# Altium PCB PCB1.PcbDoc
Units mil, origin at the board's own origin, x right, y up, seen from the top; angles counter-clockwise.
Board outline 5000 x 2500 mil, 2 copper layers (Top Layer, Bottom Layer); 38 components, 55 nets, 182 pads, 20 vias.
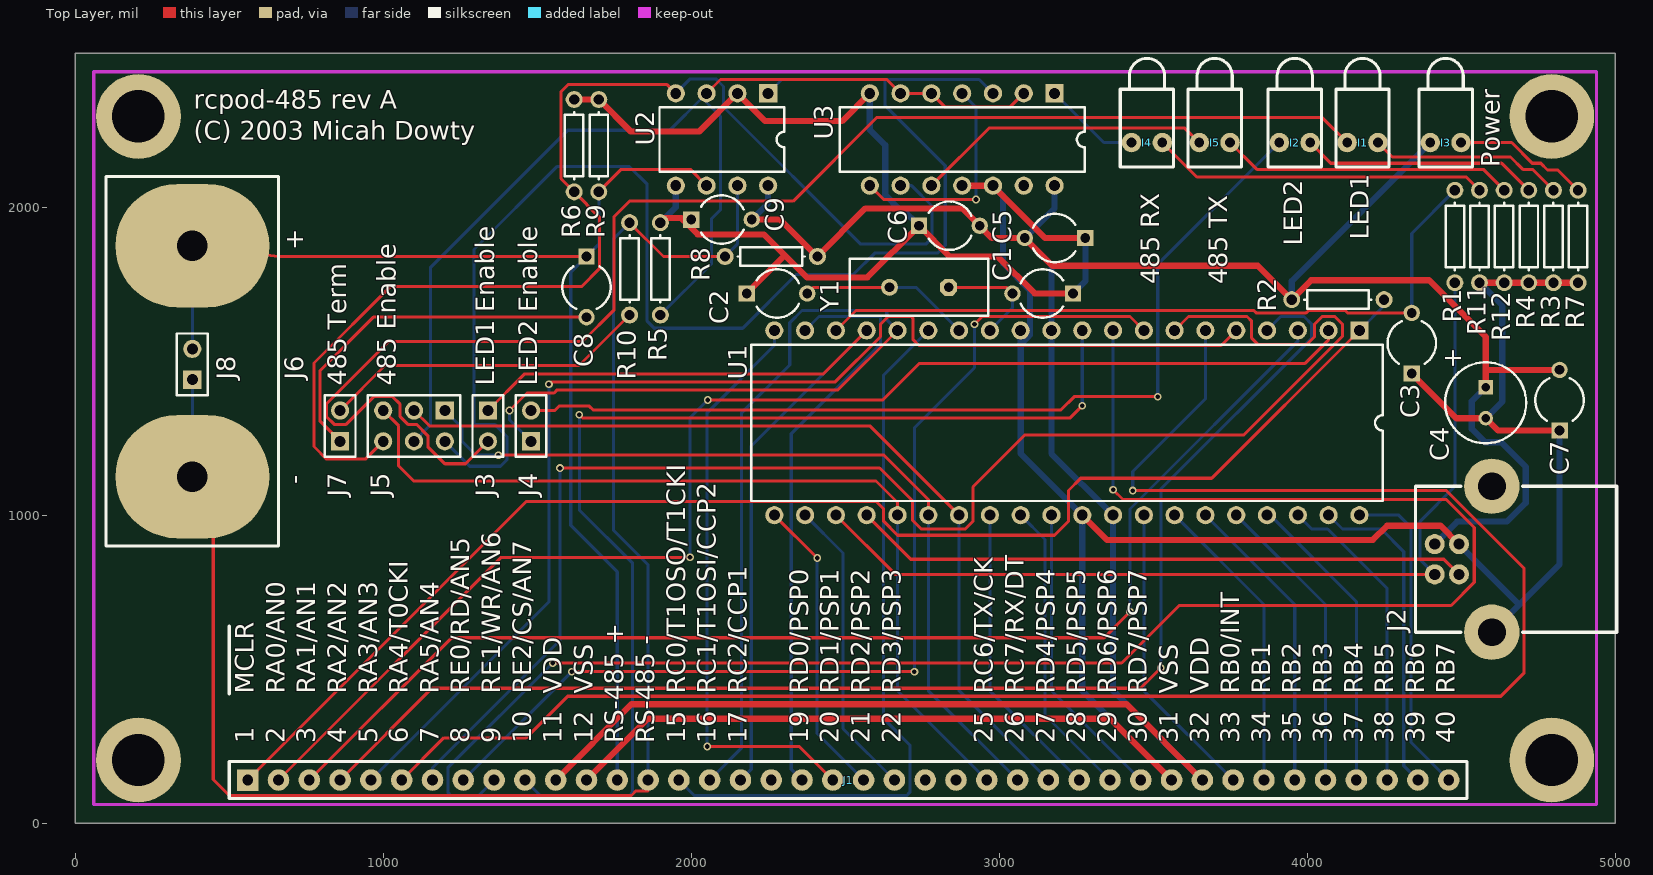
[diagram p0: Top Layer view]
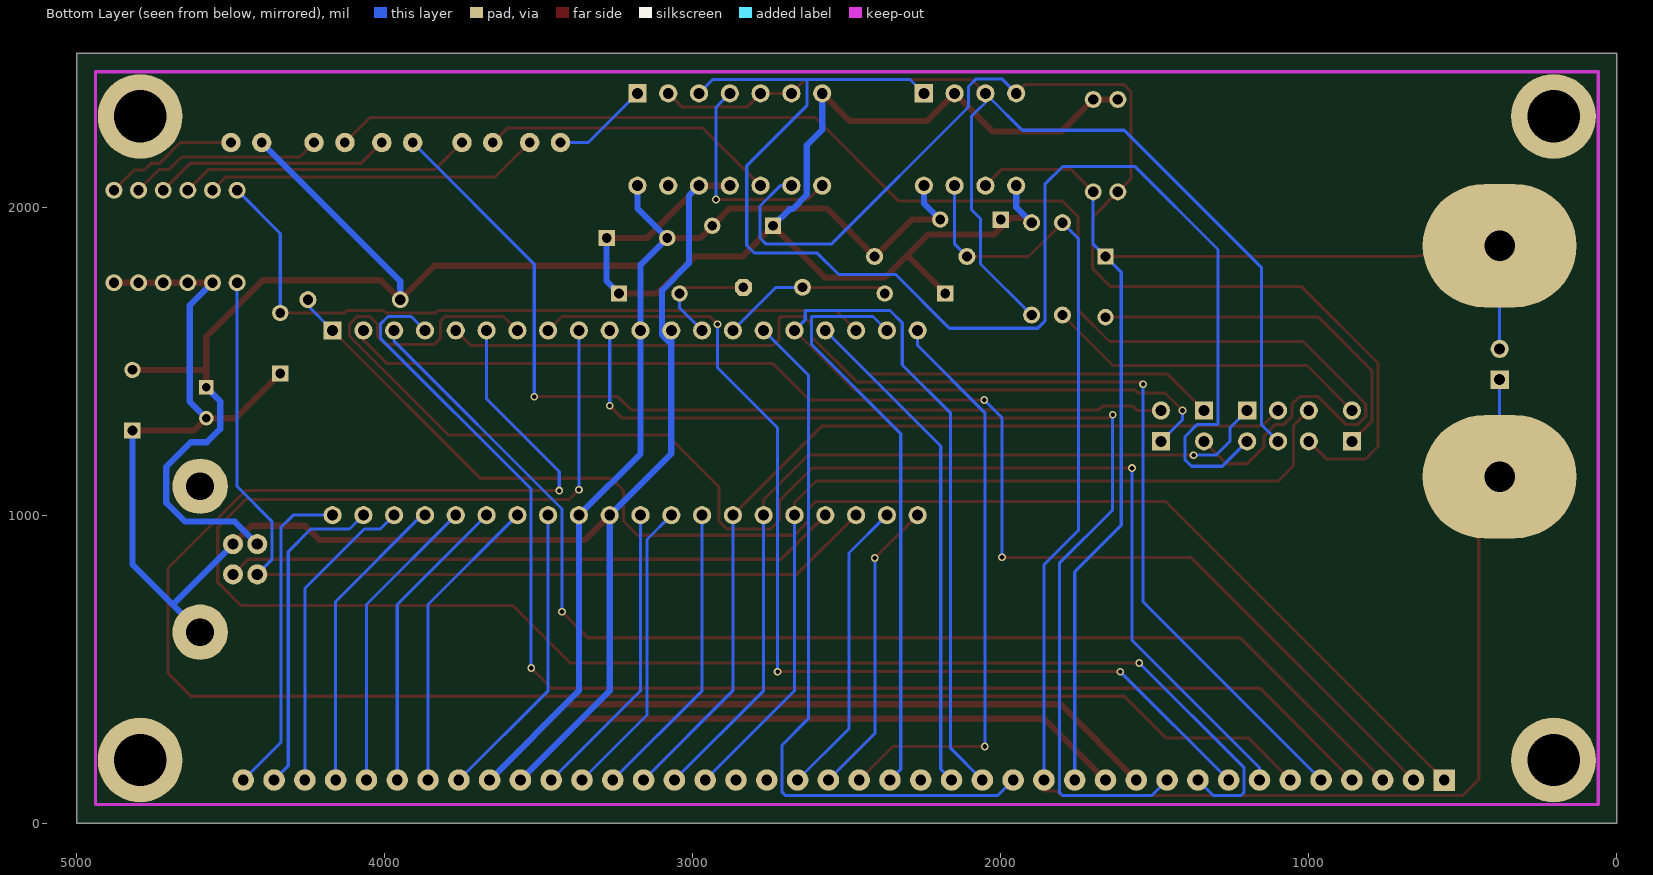
[diagram p1: Bottom Layer view, seen from below]

## Layer stack, top to bottom
Top Layer: signal copper 1.4
Dielectric: dielectric 12.6, FR-4, Dk 4.8
Bottom Layer: signal copper 1.4

## Board outline
0,0 5000,0 5000,2500 0,2500

## Design rules (kind name [scope] priority, off if disabled: settings)
Clearance [All] p1: gap=10
ComponentClearance [All] p1: gap=10 collisioncheckmode=0
PolygonConnect [All] p1: connectstyle=Relief reliefconductorwidth=10 reliefentries=4 polygonreliefangle="90 Angle"
RoomDefinition Sheet1 [InComponentClass('Sheet1')] p1: confinementstyle=ConfineIn formatcopy=TRUE outline 3940,6840 7320,6840 7320,7500 3940,7500
RoutingLayers [All] p1: top layer=Horizontal bottom layer=Vertical
RoutingVias [All] p1: holewidth=15 width=25 viastyle="Through Hole" minholewidth=15 minwidth=25 maxholewidth=15 maxwidth=25
SolderMaskExpansion [All] p1: expansion=4
TestPointUsage [All] p1: valid=0 allowmultiple=FALSE
Testpoint [All] p1: side=15 testpointundercomponent=TRUE minsize=40 maxsize=100 preferedsize=60 minholesize=0 maxholesize=40 preferedholesize=32 testpointgrid=1 style=1023 order=1234567890
Width Width_power [(InNet('VCC') or InNet('GND'))] p1: maxlimit=20 minlimit=10 preferedwidth=10 toplayer_minwidth=20 toplayer_prefwidth=20 bottomlayer_minwidth=20 bottomlayer_prefwidth=20 minimp=50.000000 maximp=50.000000 favimp=50.000000
Width [All] p2: maxlimit=10 minlimit=10 preferedwidth=10
16 further rules are at their usual default settings.

## Components (designator, comment, footprint, x,y, rotation, side; value= is the part's Value field where it differs from the comment)
C1 "Cap2" CAPR5-4X5 3240,1720 r180 top
C2 "Cap2" CAPR5-4X5 2180,1720 r0 top
C3 "" CAPR5-4X5 4340,1460 r90 top
C4 "10uF" CAP-EE-1 4580,1515 r90 top
C5 "" CAPR5-4X5 3280,1900 r180 top
C6 "" CAPR5-4X5 2740,1940 r0 top
C7 "" CAPR5-4X5 4820,1275 r90 top
C8 "" CAPR5-4X5 1660,1840 r270 top
C9 "" CAPR5-4X5 2000,1960 r0 top
I1 "LED1" LED-1-UNBROKE 4180,2210 r90 top
I2 "LED2" LED-1-UNBROKE 3960,2210 r90 top
I3 "Power" LED-1-UNBROKE 4450,2210 r90 top
I4 "485 RX" LED-1-UNBROKE 3480,2210 r90 top
I5 "485 TX" LED-1-UNBROKE 3700,2210 r90 top
J1 "GPIO" HR40 560,40 r90 top (schematic designator JP1)
J2 "USB" USB-TYPEB 4600,620 r90 top (schematic designator J1)
J3 "LED1 Enable" HDR1X2 1340,1340 r270 top
J4 "LED2 Enable" HDR1X2 1480,1240 r90 top
J5 "485 Enable" HDR2X3_NOTEXT 1200,1340 r180 top
J6 "RS-485" RS485J 380,1500 r90 top
J7 "485 Term" HDR1X2 860,1240 r90 top
J8 "RS-485" HDR1X2 380,1440 r90 top
R1 "Res1" AXIAL-0.3 4480,1905 r270 top
R2 "Res1" AXIAL-0.3 4100,1700 r180 top
R3 "Res1" AXIAL-0.3 4800,1905 r270 top
R4 "Res1" AXIAL-0.3 4720,1905 r270 top
R5 "Res1" AXIAL-0.3 1900,1800 r270 top
R6 "Res1" AXIAL-0.3 1620,2200 r270 top
R7 "" AXIAL-0.3 4880,1905 r270 top
R8 "" AXIAL-0.3 2260,1840 r180 top
R9 "" AXIAL-0.3 1700,2200 r90 top
R10 "" AXIAL-0.3 1800,1800 r90 top
R11 "" AXIAL-0.3 4560,1905 r270 top
R12 "" AXIAL-0.3 4640,1905 r270 top
U1 "PIC16C765" DIP-40 3220,1300 r180 top
U2 "MAX3082E" DIP-8 2100,2220 r180 top
U3 "MM74C02J" DIP-14 2880,2220 r180 top
Y1 "6 MHz" BCY-W2/E4.7 2740,1740 r180 top

## Footprints (in the part's own frame and the unit in brackets; to place one, negate y for a bottom-side part, rotate by r counter-clockwise, add the part's x,y. Pads: shape width x height; smd on the part's side, far side on the other; paste and mask are expansions set on the pad)
AXIAL-0.3 [mm]
  round 1.4 hole 0.85: 1(-3.81,0) 2(3.81,0)
  silkscreen extent -2.77,-0.76 2.77,0.76
BCY-W2/E4.7 [mm]
  oct 1.4x1.4 hole 0.8: 1(-2.44,0)
  round 1.4 hole 0.8: 2(2.44,0)
  silkscreen extent -5.7,-2.35 5.7,2.35
CAP-EE-1 [mm]
  rect 1.2x1.2 hole 0.7: 1(-2.54,0)
  round 1.2 hole 0.7: 2(-5.08,0)
  silkscreen extent -7.15,-3.34 -0.47,3.34
CAPR5-4X5 [mm]
  rect 1.35x1.35 hole 0.8: 1(0,0)
  round 1.35 hole 0.8: 2(5,0)
  silkscreen extent 0.81,-2 4.32,2
DIP-8 [mm]
  rect 1.5x1.5 hole 0.9: 1(-3.81,-3.81)
  round 1.5 hole 0.9: 2(-1.27,-3.81) 3(1.27,-3.81) 4(3.81,-3.81) 5(3.81,3.81) 6(1.27,3.81) 7(-1.27,3.81) 8(-3.81,3.81)
  silkscreen extent -5.15,-2.65 5.15,2.65
DIP-14 [mm]
  rect 1.5x1.5 hole 0.9: 1(-7.62,-3.81)
  round 1.5 hole 0.9: 2(-5.08,-3.81) 3(-2.54,-3.81) 4(0,-3.81) 5(2.54,-3.81) 6(5.08,-3.81) 7(7.62,-3.81) 8(7.62,3.81) 9(5.08,3.81) 10(2.54,3.81) 11(0,3.81) 12(-2.54,3.81) 13(-5.08,3.81) 14(-7.62,3.81)
  silkscreen extent -10.1,-2.65 10.1,2.65
DIP-40 [mm]
  rect 1.5x1.5 hole 0.9: 1(-24.13,-7.62)
  round 1.5 hole 0.9: 2(-21.59,-7.62) 3(-19.05,-7.62) 4(-16.51,-7.62) 5(-13.97,-7.62) 6(-11.43,-7.62) 7(-8.89,-7.62) 8(-6.35,-7.62) 9(-3.81,-7.62) 10(-1.27,-7.62) 11(1.27,-7.62) 12(3.81,-7.62) 13(6.35,-7.62) 14(8.89,-7.62) 15(11.43,-7.62) 16(13.97,-7.62) 17(16.51,-7.62) 18(19.05,-7.62) 19(21.59,-7.62) 20(24.13,-7.62) 21(24.13,7.62) 22(21.59,7.62) 23(19.05,7.62) 24(16.51,7.62) 25(13.97,7.62) 26(11.43,7.62) 27(8.89,7.62) 28(6.35,7.62) 29(3.81,7.62) 30(1.27,7.62) 31(-1.27,7.62) 32(-3.81,7.62) 33(-6.35,7.62) 34(-8.89,7.62) 35(-11.43,7.62) 36(-13.97,7.62) 37(-16.51,7.62) 38(-19.05,7.62) 39(-21.59,7.62) 40(-24.13,7.62)
  silkscreen extent -26.05,-6.45 26.05,6.45
HDR1X2 [mm]
  rect 1.5x1.5 hole 0.9: 1(0,0)
  round 1.5 hole 0.9: 2(2.54,0)
  silkscreen extent -1.27,-1.27 3.81,1.27
HDR2X3_NOTEXT [mm]
  rect 1.5x1.5 hole 0.9: 1(0,0)
  round 1.5 hole 0.9: 2(0,2.54) 3(2.54,0) 4(2.54,2.54) 5(5.08,0) 6(5.08,2.54)
  silkscreen extent -1.27,-1.27 6.35,3.81
HR40 [mil]
  rect 70x70 hole 35: 1(100,0)
  round 70 hole 35: 2(100,-100) 3(100,-200) 4(100,-300) 5(100,-400) 6(100,-500) 7(100,-600) 8(100,-700) 9(100,-800) 10(100,-900) 11(100,-1000) 12(100,-1100) 13(100,-1200) 14(100,-1300) 15(100,-1400) 16(100,-1500) 17(100,-1600) 18(100,-1700) 19(100,-1800) 20(100,-1900) 21(100,-2000) 22(100,-2100) 23(100,-2200) 24(100,-2300) 25(100,-2400) 26(100,-2500) 27(100,-2600) 28(100,-2700) 29(100,-2800) 30(100,-2900) 31(100,-3000) 32(100,-3100) 33(100,-3200) 34(100,-3300) 35(100,-3400) 36(100,-3500) 37(100,-3600) 38(100,-3700) 39(100,-3800) 40(100,-3900)
  silkscreen extent 40,-3960 600,60
LED-1-UNBROKE [mm]
  round 1.6 hole 0.8: 1(0,1.27) 2(0,-1.27)
  silkscreen extent -2,-2.2 6.95,2.2
RS485J [mil]
  oval 400x500 hole 100: 1(-375,0) 2(375,0)
  Top Layer lines w10: 180,0 375,0
  silkscreen extent -600,-280 600,280
USB-TYPEB [mm]
  round 1.651 hole 0.92: 1(7.27,4.71) 2(4.77,4.71) 3(4.77,2.71) 4(7.27,2.71)
  round 4.572 hole 2.3: 5(0,0) 5(12.04,0)
  silkscreen extent 0,-10.3 12.04,6.3

## Part data
C1 C2: "Capacitor"
C3 C5 C6 C7 C8 C9: library part Cap2, "Capacitor"
C4: library part "Cap Pol1", "Polarized Capacitor (Radial)"
I1: "Typical RED GaAs LED"
I2 I3 I4 I5: library part LED1, "Typical RED GaAs LED"
J1: library part MHDR2X20, "Header, 20-Pin, Dual row"
J2: library part "USB Type B", "Header, 4-Pin"
J3 J4 J6 J7 J8: library part MHDR1X2, "Header, 2-Pin"
J5: library part MHDR2X3, "Header, 3-Pin, Dual row"
R1 R2 R3 R4 R5 R6: "Resistor"
R7 R8 R9 R10 R11 R12: library part Res1, "Resistor"
U1: "EPROM-Based 8-Bit CMOS Microcontroller with USB"
U2: "+5V-Powered, RS-485 Driver/Receiver"
U3: library part MM74C00J, "Quad 2-Input NAND Gate"
Y1: library part XTAL, "Crystal Oscillator"

## Free pads (board coordinates)
  round 275 hole 170: 0(205,205) 0(205,2295) 0(4795,205) 0(4795,2295)

## Via types
v1: diameter 25, hole 15, Top Layer to Bottom Layer, 20 vias

## Nets (pads, with @x,y where several pads share a name; then routed paths per layer and width w, separated by ;. In a path a pad name is that pad's centre, name@x,y a point inside that pad or via, vN(x,y) a via of type N, cw(c..) or ccw(c..) an arc to the next point about the centre after c; other vN are vias at no path point)
GND: C1.1 C2.1 C3.1 C4.2 C5.1 C6.1 C7.1 C9.1 J1.12 J1.31 J2.4 J2.5@4600,620 R3.2 R4.2 R5.1 R6.1 R7.2 R9.2 R11.2 R12.2 U1.12 U1.31 U2.2 U2.5 U3.7 U3.11 U3.12 | length 12226.4
  Top Layer w20: R6.1 R9.2 1804,2246 2026,2246 U2.2 2240,2280 2490,2280 U3.7 ; J1.12 1859,339 3361,339 J1.31 ; R5.1 1915,1965 1968,1965 1973,1960 ; C9.1 1973,1960 ; C2.1 2304,1844 ; U3.11 U3.12 3150,1900 C5.1 ; C1.1 3115,1720 2995,1840 2840,1840 C6.1 2572,1772 2376,1772 2304,1844 ; U1.31 3350,920 4214,920 4260,966 4433.53,966 J2.4 ; C3.1 4485,1315 C4.2 4620,1275 C7.1 ; R11.2 R12.2 R4.2 R3.2 R7.2 ; 1973,1960 1986.5,1946.5 2021,1912 2236,1912 2304,1844
  Bottom Layer w20: R5.1 1950,2000 U2.5 ; U3.7 2580,2252 2630,2202 2630,2040 2676,1994 2686,1994 C6.1 ; U3.12 3013,2037 3013,1817.4 3100,1730.4 3100,1600 3100,1585.47 3092.26,1577.74 3070,1555.47 ; U1.12 3070,1555.47 ; C1.1 3280,1760 C5.1 ; J1.31 3270,430 U1.31 3070,1200 3070,1555.47 ; J2.4 4689.76,709.76 ; R11.2 4634,1681 4634,1369 C4.2 ; J2.5@4600,620 4689.76,709.76 ; C7.1 4820,840 4689.76,709.76
NetC1_2: C1.2 U1.13 Y1.1 | length 365.7
  Top Layer w10: Y1.1 3023.15,1740 C1.2
  Bottom Layer w10: U1.13 3043.15,1673.15 C1.2
NetC2_2: C2.2 U1.14 Y1.2 | length 559.4
  Top Layer w10: C2.2 2396.85,1740 Y1.2
  Bottom Layer w10: Y1.2 2730,1740 U1.14
NetC3_2: C3.2 R1.1 U1.18 | length 2363.1
  Top Layer w10: U1.18 2535,1665 3827,1665 3835,1657 3997,1657 4005,1665 4123.85,1665 4132,1656.85 C3.2
  Bottom Layer w10: C3.2 4340,1915 R1.1
NetC8_1: C8.1 J1.13 J6.2 J8.2 R9.1 U2.6 | length 4029.6
  Top Layer w10: J6.2 660,1840 680,1840 C8.1 ; R9.1 1773,2123 1997,2123 U2.6
  Bottom Layer w10: J8.2 J6.2 ; R9.1 1700,1880 C8.1 1609,1789 1609,967 1760,816 J1.13
NetC8_2: C8.2 J7.1 | length 1193.7
  Top Layer w10: J7.1 795,1305 795,1470.15 968,1643.15 C8.2
NetI1_1: I1.1 J3.2 | length 4689.7
  Top Layer w10: J3.2 1267,1167 1200,1167 1145,1222 1145,1257.97 1107.97,1295 1080,1295 1055,1320 1055,1360 1030,1385 969.53,1385 879.53,1295 840.47,1295 815,1320.47 815,1361 1018,1564 1647,1564 1750,1667 1750,1970 1800,2020 2331,2020 2602,2291 4049,2291 I1.1
NetI1_2: I1.2 R3.1 | length 634.2
  Top Layer w10: I1.2 4277,2163 4660.5,2163 4700.5,2123 4732,2123 R3.1
NetI2_1: I2.1 J4.2 | length 3052.2
  Top Layer w10: J4.2 1557,1340 1571,1354 1669,1354 1681,1342 3201,1342 3244,1385 v1(3515,1385)
  Bottom Layer w10: v1(3515,1385) 3515,1815 I2.1
NetI2_2: I2.2 R4.1 | length 774.2
  Top Layer w10: I2.2 4077,2143 4632,2143 R4.1
NetI3_2: I3.2 R7.1 | length 444.2
  Top Layer w10: I3.2 4664.33,2210 4731.33,2143 4759,2143 4781,2121 4814,2121 R7.1
NetI4_1: I4.1 U3.1 | length 316.3
  Bottom Layer w10: U3.1 3340,2210 I4.1
NetI4_2: I4.2 R11.1 | length 1094.2
  Top Layer w10: I4.2 3642,2098 4517,2098 R11.1
NetI5_1: I5.1 U3.10 | length 966.9
  Top Layer w10: U3.10 2967,2257 3603,2257 I5.1
NetI5_2: I5.2 R12.1 | length 954.2
  Top Layer w10: I5.2 3837,2123 4572,2123 R12.1
NetJ1_14: J1.14 J6.1 J8.1 R8.2 R10.2 U2.7 | length 5320.8
  Top Layer w10: J6.1 448,1125 448,142 500,90 1806,90 1821,105 1860,105 J1.14 ; R10.2 1910,1840 R8.2
  Bottom Layer w10: J6.1 J8.1 ; R10.2 1748,1898 1748,951 1860,839 J1.14 ; R8.2 2150,1880 U2.7
NetJ2_2: J2.2 R1.2 U1.23 | length 3037.9
  Top Layer w10: U1.23 2662.2,807.8 J2.2
  Bottom Layer w10: J2.2 4367,855.36 4367,980 4480,1093 R1.2
NetJ2_3: J2.3 U1.24 | length 2002.9
  Top Layer w10: U1.24 2713,857 4444.1,857 J2.3
NetJ5_2: J5.2 U2.1 U3.3 | length 4628.9
  Bottom Layer w10: J5.2 1281,1159 1381,1159 1402,1180 1402,1255 1362,1295 1295,1295 1295,1863 1564,2132 1800,2132 1857,2075 1857,1630 1880,1607 2167,1607 2342,1782 2527,1782 2596,1851 2800,1851 2825,1876 2825,2135 2630,2330 2630,2415 ; U2.1 2295,2415 2630,2415 ; U3.3 2935,2415 2630,2415
NetJ5_4: J5.4 R5.2 U2.3 U3.2 U3.5 U3.6 | length 3632.6
  Top Layer w10: U2.3 2095,2415 2635,2415 U3.6 U3.5 2825,2325 3035,2325 U3.2
  Bottom Layer w10: J5.4 1153,1293 1153,1804 1599,2250 1930,2250 U2.3@2035,2355 ; R5.2 2066,1816 2066,1963 2095,1992 2095,2295 U2.3@2035,2355 ; U2.3 U2.3@2035,2355
NetJ5_6: J5.6 R6.2 U2.4 U3.9 | length 3966.2
  Top Layer w10: J5.6 942,1182 816,1182 775,1223 775,1494 1023,1742 1644,1742 1702,1800 1702,1968 R6.2 1577,2093 1577,2375 1600,2398 1922,2398 U2.4
  Bottom Layer w10: U2.4 1997,2417 2080,2417 2105,2392 2105,2325.47 2550.47,1880 2762,1880 2782,1900 2782,2004 2716,2070 U3.9
NetJ7_2: J7.2 R10.1 | length 1068.4
  Top Layer w10: J7.2 1006,1486 1636,1486 R10.1
NetU3_4: U3.4 U3.8 | length 727.3
  Top Layer w10: U3.8 2625,2025 v1(2925,2025)
  Bottom Layer w10: U3.4 2925,2325 v1(2925,2025)
PIN1: J1.1 R2.1 U1.1 | length 4521
  Top Layer w10: J1.1 1465,1045 2600,1045 2625,1020 2625,980 2670,935 3180,935 3225,980 3225,1080 3265,1120 3690,1120 U1.1
  Bottom Layer w10: U1.1 4250,1680 R2.1
PIN2: J1.2 U1.2 | length 4297.7
  Top Layer w10: J1.2 1383,863 v1(1996,863) ; v1(2054,1374) 2622,1374 2740,1492 3992,1492 4070,1570 U1.2
  Bottom Layer w10: v1(1996,863) 1996,1316 v1(2054,1374)
PIN3: J1.3 U1.3 | length 4030.9
  Top Layer w10: J1.3 1222,602 3341,602 v1(3425,686)
  Bottom Layer w10: v1(3425,686) 3425,1020 3970,1565 U1.3
PIN4: J1.4 U1.4 | length 4308.7
  Top Layer w10: J1.4 1158,438 3459,438 v1(3525,504)
  Bottom Layer w10: v1(3525,504) 3525,1085 4015,1575 4015,1620 3990,1645 3915,1645 U1.4
PIN5: J1.5 U1.5 | length 3970.3
  Top Layer w10: v1(1538,1425) 1546,1433 2468,1433 2615,1580 2615,1620 2640,1645 2714.53,1645 2720,1639.53 2720,1571 2740,1551 3721,1551 U1.5
  Bottom Layer w10: J1.5 1538,718 v1(1538,1425)
PIN6: J1.6 U1.6 | length 6121.7
  Top Layer w10: J1.6 1197,277 1464,277 1599,412 4629,412 4705,488 4705,827 4452,1080 v1(3434,1080)
  Bottom Layer w10: v1(3434,1080) 3434,1142 3670,1378 U1.6
PIN7: J1.7 U1.7 | length 4913.1
  Top Layer w10: v1(1574,1153) 2612,1153 2719,1046 2719,983 2747,955 2890,955 2915,980 2915,1092 3084,1261 3795,1261 4115,1581 4115,1620 4090,1645 4049,1645 4024,1620 4024,1579 4000,1555 3840,1555 3820,1575 3820,1630 3805,1645 3615,1645 U1.7
  Bottom Layer w10: J1.7 1160,180 1574,594 v1(1574,1153)
PIN8: J1.8 U1.8 | length 3398.6
  Top Layer w10: v1(1612,492) v1(2725,492) ; v1(2920,1620) 2945,1645 3425,1645 U1.8
  Bottom Layer w10: J1.8 v1(1612,492) ; v1(2725,492) 2725,1284 2920,1479 v1(2920,1620)
PIN9: J1.9 U1.9 | length 5756.2
  Top Layer w10: v1(1550,520) 3398,520 3585,707 4468,707 4543,782 4543,960 4452,1051 3402,1051 v1(3370,1083)
  Bottom Layer w10: J1.9 1310,90 1220,90 1210,100 1210,180 v1(1550,520) ; v1(3370,1083) U1.9
PIN10: J1.10 U1.10 | length 3570.8
  Top Layer w10: v1(1637,1326) 1647,1316 3231,1316 v1(3270,1355)
  Bottom Layer w10: J1.10 1510,90 1800,90 1810,100 1810,844 1637,1017 v1(1637,1326) ; v1(3270,1355) U1.10
PIN15: J1.15 U1.15 | length 2370.1
  Bottom Layer w10: J1.15 2010,90 2700,90 2710,100 2710,254 2625,339 2625,1455 U1.15
PIN16: J1.16 J4.1 U1.16 | length 3500.5
  Top Layer w10: v1(1410,1340) 1467,1397 1555,1397 1565,1407 2477,1407 U1.16
  Bottom Layer w10: v1(1410,1340) 1410,1310 J4.1 ; J1.16 2163,243 2163,1331 2320,1488 2320,1625 2360,1665 2635,1665 2635,1635 U1.16
PIN17: J1.17 J3.1 U1.17 | length 2967.5
  Top Layer w10: J3.1 1458,1458 2428,1458 U1.17
  Bottom Layer w10: J1.17 2195,175 2195,1225 U1.17
PIN19: J1.19 U1.19 | length 1902.4
  Bottom Layer w10: J1.19 2325,175 2325,1265 2615,1555 2615,1643.53 2613.53,1645 2415,1645 U1.19
PIN20: J1.20 U1.20 | length 1894.4
  Top Layer w10: v1(2052,249) 2351,249 J1.20
  Bottom Layer w10: v1(2052,249) 2052,1333 2270,1551 U1.20
PIN21: J1.21 U1.21 | length 980.1
  Top Layer w10: U1.21 v1(2409,861)
  Bottom Layer w10: v1(2409,861) 2409,291 J1.21
PIN22: J1.22 U1.22 | length 980.1
  Bottom Layer w10: U1.22 2493,877 2493,307 J1.22
PIN25: J1.25 J5.5 U1.25 | length 2891.1
  Top Layer w10: J5.5 1050,1290 1050,1160 1099,1111 2600,1111 2670,1041 U1.25
  Bottom Layer w10: U1.25 2670,430 J1.25
PIN26: J1.26 J5.1 U1.26 | length 2746.6
  Top Layer w10: v1(1374,1195) 2626,1195 2770,1051 U1.26
  Bottom Layer w10: J5.1 1256,1284 1256,1240 1301,1195 v1(1374,1195) ; U1.26 2770,430 J1.26
PIN27: J1.27 J5.3 U1.27 | length 2891
  Top Layer w10: J5.3 1150,1290 2580,1290 U1.27
  Bottom Layer w10: U1.27 2870,430 J1.27
PIN28: J1.28 U1.28 | length 980.1
  Bottom Layer w10: U1.28 2970,430 J1.28
PIN29: J1.29 U1.29 | length 980.1
  Bottom Layer w10: U1.29 3149,921 3149,351 J1.29
PIN30: J1.30 U1.30 | length 980.1
  Bottom Layer w10: U1.30 3170,430 J1.30
PIN33: J1.33 U1.33 | length 980.1
  Bottom Layer w10: U1.33 3470,430 J1.33
PIN34: J1.34 U1.34 | length 980.1
  Bottom Layer w10: U1.34 3860,710 J1.34
PIN35: J1.35 U1.35 | length 980.1
  Bottom Layer w10: U1.35 3960,710 J1.35
PIN36: J1.36 U1.36 | length 980.1
  Bottom Layer w10: U1.36 4060,710 J1.36
PIN37: J1.37 U1.37 | length 986
  Bottom Layer w10: U1.37 3880,1000 4160,720 J1.37
PIN38: J1.38 U1.38 | length 1010.6
  Bottom Layer w10: U1.38 4015,955 4067,955 4260,762 J1.38
PIN39: J1.39 U1.39 | length 1053.6
  Bottom Layer w10: U1.39 4115,955 4240.47,955 4314,881.47 4314,186 J1.39
PIN40: J1.40 U1.40 | length 1055.1
  Bottom Layer w10: U1.40 4298,1000 4338,960 4338,262 J1.40
VCC: C4.1 C5.2 C6.2 C7.2 C9.2 I3.1 J1.11 J1.32 J2.1 R2.2 R8.1 U1.11 U1.32 U2.8 U3.14 | length 9315.1
  Top Layer w20: J1.11 1806,386 3414,386 J1.32 ; C9.2 2290,1960 R8.1 2566,1996 2880.85,1996 C6.2 2976.85,1900 C5.2 3173.15,1810 3840,1810 R2.2 4013,1763 4396,1763 4580,1579 4580,1471.85 ; C4.1 4580,1471.85 ; C7.2 4580,1471.85
  Bottom Layer w20: C9.2 2250,2013.15 U2.8 ; U3.14 3180,1996.85 C5.2 3170,1813.15 U1.11 3170,1200 U1.32 3370,430 J1.32 ; R2.2 3950,1760 I3.1 ; J2.1 4487.34,979 4649,979 4710,1040 4710,1157 4630,1237 4578,1237 4535,1280 4535,1370 C4.1
pads on no net: J1.18 J1.23 J1.24 J2.5@4600,1094.02 U3.13

## Keep-outs
Keep-Out Layer:
  lines w10: 60,60 60,2440 4940,2440 4940,60 60,60

## Silkscreen, mask and mechanical layers (free items; w line width, h text height)
Top Overlay:
  text "rcpod-485 rev A" at 385,2320 h60
  text "(C) 2003 Micah Dowty" at 385,2220 h60
Mechanical 1:
  the board outline again, w10

## Text inside footprints (layer, text, board x,y; h text height)
C4: Top Overlay "+" at 4500,1475 h59.06 r90
J1: Top Overlay "RC1/T1OSI/CCP2" at 2080,420 h60 r90; Top Overlay "MCLR" at 580,420 h60 r90; Top Overlay "RA0/AN0" at 680,420 h60 r90; Top Overlay "RA1/AN1" at 780,420 h60 r90; Top Overlay "RA2/AN2" at 880,420 h60 r90; Top Overlay "RA3/AN3" at 980,420 h60 r90; Top Overlay "RA4/T0CKI" at 1080,420 h60 r90; Top Overlay "RA5/AN4" at 1180,420 h60 r90; Top Overlay "RE0/RD/AN5" at 1280,420 h60 r90; Top Overlay "RE1/WR/AN6" at 1380,420 h60 r90; Top Overlay "RE2/CS/AN7" at 1480,420 h60 r90; Top Overlay "VDD" at 1580,420 h60 r90; Top Overlay "VSS" at 1680,420 h60 r90; Top Overlay "RC0/T1OSO/T1CKI" at 1980,420 h60 r90; Top Overlay "RC2/CCP1" at 2180,420 h60 r90; Top Overlay "RD0/PSP0" at 2380,420 h60 r90; Top Overlay "RD1/PSP1" at 2480,420 h60 r90; Top Overlay "RD2/PSP2" at 2580,420 h60 r90; Top Overlay "RD3/PSP3" at 2680,420 h60 r90; Top Overlay "RC6/TX/CK" at 2980,420 h60 r90; Top Overlay "RC7/RX/DT" at 3080,420 h60 r90; Top Overlay "RD4/PSP4" at 3180,420 h60 r90; Top Overlay "RD5/PSP5" at 3280,420 h60 r90; Top Overlay "RD6/PSP6" at 3380,420 h60 r90; Top Overlay "RD7/PSP7" at 3480,420 h60 r90; Top Overlay "VSS" at 3580,420 h60 r90; Top Overlay "VDD" at 3680,420 h60 r90; Top Overlay "RB0/INT" at 3780,420 h60 r90; Top Overlay "RB1" at 3880,420 h60 r90; Top Overlay "RB2" at 3980,420 h60 r90; Top Overlay "RB4" at 4180,420 h60 r90; Top Overlay "RB5" at 4280,420 h60 r90; Top Overlay "RB6" at 4380,420 h60 r90; Top Overlay "RB7" at 4480,420 h60 r90; Top Overlay "RB3" at 4080,420 h60 r90; Top Overlay "1" at 580,260 h60 r90; Top Overlay "2" at 680,260 h60 r90; Top Overlay "3" at 780,260 h60 r90; Top Overlay "4" at 880,260 h60 r90; Top Overlay "5" at 980,260 h60 r90; Top Overlay "6" at 1080,260 h60 r90; Top Overlay "7" at 1180,260 h60 r90; Top Overlay "8" at 1280,260 h60 r90; Top Overlay "9" at 1380,260 h60 r90; Top Overlay "10" at 1480,260 h60 r90; Top Overlay "11" at 1580,260 h60 r90; Top Overlay "12" at 1680,260 h60 r90; Top Overlay "16" at 2080,260 h60 r90; Top Overlay "15" at 1980,260 h60 r90; Top Overlay "17" at 2180,260 h60 r90; Top Overlay "19" at 2380,260 h60 r90; Top Overlay "20" at 2480,260 h60 r90; Top Overlay "21" at 2580,260 h60 r90; Top Overlay "22" at 2680,260 h60 r90; Top Overlay "25" at 2980,260 h60 r90; Top Overlay "26" at 3080,260 h60 r90; Top Overlay "27" at 3180,260 h60 r90; Top Overlay "28" at 3280,260 h60 r90; Top Overlay "29" at 3380,260 h60 r90; Top Overlay "30" at 3480,260 h60 r90; Top Overlay "31" at 3580,260 h60 r90; Top Overlay "32" at 3680,260 h60 r90; Top Overlay "33" at 3780,260 h60 r90; Top Overlay "34" at 3880,260 h60 r90; Top Overlay "35" at 3980,260 h60 r90; Top Overlay "37" at 4180,260 h60 r90; Top Overlay "38" at 4280,260 h60 r90; Top Overlay "39" at 4380,260 h60 r90; Top Overlay "40" at 4480,260 h60 r90; Top Overlay "36" at 4080,260 h60 r90; Top Overlay "RS-485 +" at 1780,260 h60 r90; Top Overlay "RS-485 -" at 1880,260 h60 r90
J6: Top Overlay "+" at 740,1860 h60 r90; Top Overlay "-" at 740,1100 h60 r90